# EAGLE board RC_remote (EAGLE 9.6.2)
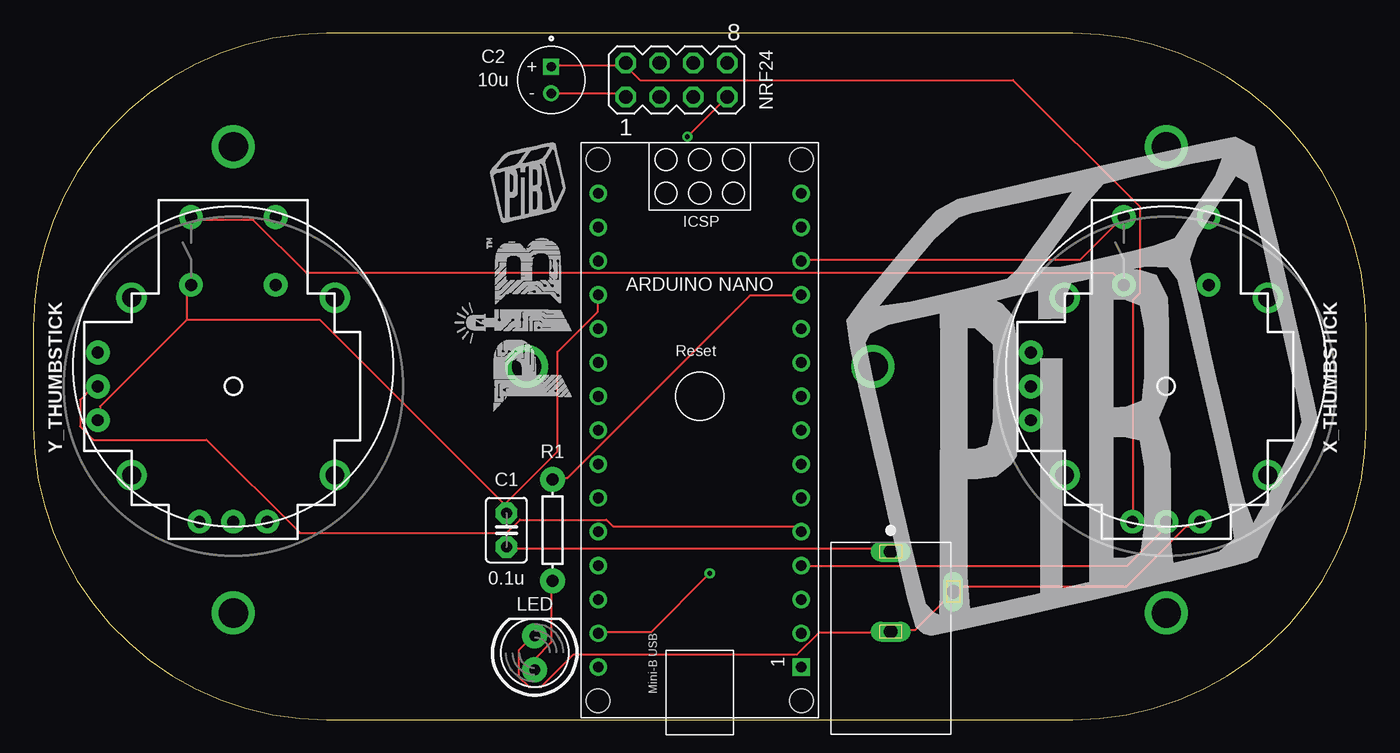
[diagram p0: board, top side]
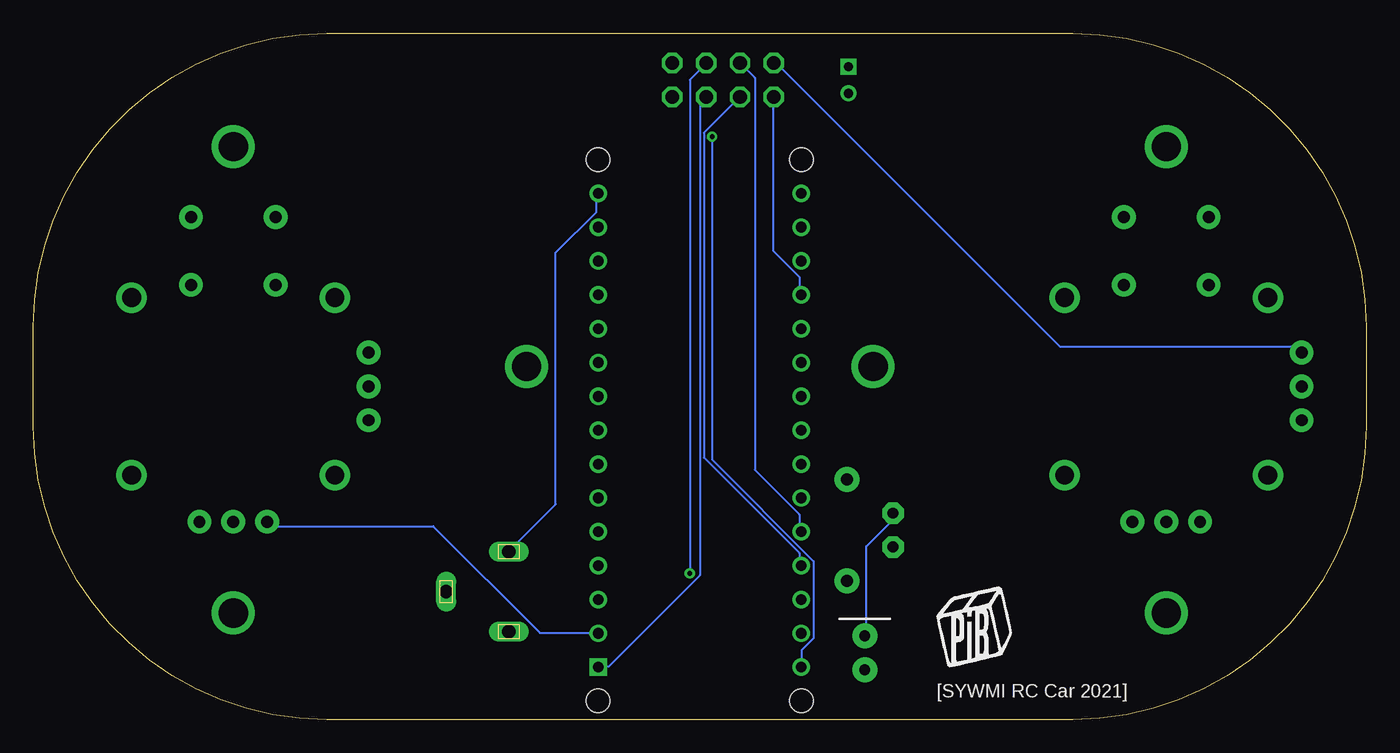
[diagram p1: board, bottom side, seen from below]

Size 100 x 51.5 mm. Coordinates in mm from the lower left corner, seen from the top.
Outline: 0,29.5 0,22 arc90 22,0 78,0 arc90 100,22 100,29.5 arc90 78,51.5 22,51.5 arc90 0,29.5
Copper layers (1*16): Top 0.035mm / dielectric 1.5mm / Bottom 0.035mm
Design rules "default": minimum track width 6mil, minimum drill 0.35mm, track to track 6mil, track to pad 6mil, pad to pad 6mil, via to via 6mil, smd to smd 6mil, copper to edge 40mil, drill to drill 6mil, minimum pad ring 10mil, minimum via ring 8mil, stop-mask expansion 4mil, vias tented up to drill 0mil, thermal gap 10mil

## Footprints (pad centres in the part's own frame; a part is rotated, then mirrored left to right if it is on the bottom)
ARDUINO_NANO = drill 0.8 square: 1 -20.32,-7.62 | drill 0.8: 2 -17.78,-7.62; 3 -15.24,-7.62; 4 -12.7,-7.62; 5 -10.16,-7.62; 6 -7.62,-7.62; 7 -5.08,-7.62; 8 -2.54,-7.62; 9 0,-7.62; 10 2.54,-7.62; 11 5.08,-7.62; 12 7.62,-7.62; 13 10.16,-7.62; 14 12.7,-7.62; 15 15.24,-7.62; 16 15.24,7.62; 17 12.7,7.62; 18 10.16,7.62; 19 7.62,7.62; 20 5.08,7.62; 21 2.54,7.62; 22 0,7.62; 23 -2.54,7.62; 24 -5.08,7.62; 25 -7.62,7.62; 26 -10.16,7.62; 27 -12.7,7.62; 28 -15.24,7.62; 29 -17.78,7.62; 30 -20.32,7.62 | hole 1.778: -22.86,-7.62; -22.86,7.62; 17.78,7.62; 17.78,-7.62
C2.5-3 = drill 0.813 pad 1.6 octagon: 1 -1.27,0; 2 1.27,0
CAPPRD200W50D550H1250 = drill 0.7 square: 1 -1,0 | drill 0.7: 2 1,0
LED_5MM = drill 0.813 pad 1.88: A -1.27,0; K 1.27,0
CUI_PJ-102AH = drill 1 long: 1 -6.5,0; 2 -0.5,0; 3 -3.5,4.7
MA04-2 = drill 1.016 octagon: 1 -3.81,-1.27; 2 -3.81,1.27; 3 -1.27,-1.27; 4 -1.27,1.27; 5 1.27,-1.27; 6 1.27,1.27; 7 3.81,-1.27; 8 3.81,1.27
AXIAL-0.3 = drill 0.9 pad 1.88: P$1 -3.81,0; P$2 3.81,0
JOYSTICK = drill 0.9 pad 1.778: B1A -3.175,12.7; B1B 3.175,12.7; B2A -3.175,7.62; B2B 3.175,7.62 | drill 0.889 pad 1.778: H1 -2.54,-10.16; H2 0,-10.16; H3 2.54,-10.16; V1 -10.16,2.54; V2 -10.16,0; V3 -10.16,-2.54 | drill 1.397 pad 2.286: MOUNT1 -7.62,6.668; MOUNT2 -7.62,-6.668; MOUNT3 7.62,-6.668; MOUNT4 7.62,6.668

## Placement (x,y rotation side)
ARDUINO_NANO1  [ARDUINO_NANO]  50,24.25 90 top
C1  .1u  [C2.5-3]  35.5,14.22 90 top
C2  10u  [CAPPRD200W50D550H1250]  38.85,48 270 top
D1  [LED_5MM]  37.62,5 90 top
J1  PJ-102AH  [CUI_PJ-102AH]  64.33,6.1 270 top
NRF24L01  [MA04-2]  48.25,48 0 top
R1  330  [AXIAL-0.3]  38.95,14.22 270 top
U$1  [PIB_LOGO_40MM]  78.7,25 0 top
U$2  [PIB-LOGO]  36,29.65 90 top
U$3  [PIB_LOGO_10MM]  37.1,40.3 0 top
U$4  [PIB_LOGO_10MM]  29.4,6.95 0 bottom
X_THUMBSTICK  JOYSTICK_THUMB  [JOYSTICK]  85,25 0 top
Y_THUMBSTICK  JOYSTICK_THUMB  [JOYSTICK]  15,25 0 top

## Library data of the parts
ARDUINO_NANO1 = ArduinoNano
C1 = capacitor-wima
C2 = UVR1E100MDD; DESCRIPTION: 10 µF 25 V Aluminum Electrolytic Capacitors Radial, Can - 2000 Hrs @ 85°C; DIGI-KEY_PART_NUMBER: UVR1E100MDD1TA-ND; MF: Nichicon; MP: UVR1E100MDD; PACKAGE: Radial Nichicon; PURCHASE-URL: https://pricing.snapeda.com/search/part/UVR1E100MDD/?ref=eda
D1 = SparkFun-LED
J1 = PJ-102AH; AVAILABILITY: In Stock; CUI_PURCHASE_URL: https://www.cuidevices.com/product/interconnect/connectors/dc-power-connectors/jacks/pj-102ah?utm_source=snapeda.com&utm_medium=referral&utm_campaign=snapedaBOM; DESCRIPTION: 2.0 x 6.5 mm, 5.0 A, Horizontal, Through Hole, Tapered Pins, Dc Power Jack Connector; MF: CUI Devices; MP: PJ-102AH; PACKAGE: None; PRICE: None; PURCHASE-URL: https://pricing.snapeda.com/search/part/PJ-102AH/?ref=eda
NRF24L01 = con-lstb; OC_FARNELL: unknown; OC_NEWARK: unknown
R1 = SparkFun-Resistors
U$1-U$4 = PiB_logo
X_THUMBSTICK Y_THUMBSTICK = SparkFun-Switches; PROD_ID: COMP-09744; SF_SKU: COM-09032

## Nets
0: ARDUINO_NANO1.19 C1.2 C2.2 D1.K J1.2 J1.3 NRF24L01.1 X_THUMBSTICK.H3 Y_THUMBSTICK.B2A Y_THUMBSTICK.V3
3.3V: ARDUINO_NANO1.2 C2.1 NRF24L01.2 X_THUMBSTICK.H1 Y_THUMBSTICK.V1
5V: ARDUINO_NANO1.12 R1.P$1
CE: ARDUINO_NANO1.27 NRF24L01.3
CSN: ARDUINO_NANO1.26 NRF24L01.4
GND: ARDUINO_NANO1.14
MISO: ARDUINO_NANO1.30 NRF24L01.7
MOSI: ARDUINO_NANO1.29 NRF24L01.6
N$1: D1.A R1.P$2
RESET: ARDUINO_NANO1.13 X_THUMBSTICK.B1A
SCK: ARDUINO_NANO1.1 NRF24L01.5
SWITCH: X_THUMBSTICK.B2A Y_THUMBSTICK.B1A
V_IN: ARDUINO_NANO1.15 C1.1 J1.1
X_AXIS: ARDUINO_NANO1.4 X_THUMBSTICK.H2
Y_AXIS: ARDUINO_NANO1.5 Y_THUMBSTICK.V2

## Tracks (layer width: path | path; a pad name or v marks a point on that pad's centre or on a via)
0
  Top 0.152: ARDUINO_NANO1.19 42.37,31.85 42.37,30.63 39.32,27.58 39.32,20.12 35.51,16.31 35.51,15.54 C1.2 35.5,16 21.5,30 11.5,30 | D1.K 37.49,6.25 36.42,5.18 36.42,3.2 37.19,2.44 38.1,2.44 40.54,4.88 57.3,4.88 58.98,6.55 64.31,6.55 J1.2 64.47,6.71 66.14,6.71 68.89,9.45 J1.3 69.5,10 82,10 86.5,14.5 87.5,14.5 X_THUMBSTICK.H3 | C2.2 44.17,47 NRF24L01.1 | 11.5,30 5,23.5 5,22.5 Y_THUMBSTICK.V3 | 11.5,30 11.5,32.5 Y_THUMBSTICK.B2A
  Bottom 0.152: ARDUINO_NANO1.19 42.52,32 42.52,33.22 44.5,35.2 44.5,46.5 NRF24L01.1 | C1.2 35.5,15 37.5,13 37.5,6.5 D1.K
3.3V
  Top 0.152: C2.1 38.86,49.07 44.2,49.07 44.35,49.23 NRF24L01.2 44.5,49 45.5,48 73.5,48 83,38.5 83,32 82.5,31.5 82.5,15 X_THUMBSTICK.H1
  Bottom 0.152: ARDUINO_NANO1.2 58,6.5 62,6.5 70,14.5 82,14.5 X_THUMBSTICK.H1 | Y_THUMBSTICK.V1 5,28 23,28 44,49 NRF24L01.2
5V
  Top 0.152: ARDUINO_NANO1.12 57.61,31.85 53.8,31.85 40.08,18.14 39.01,18.14 R1.P$1
CE
  Bottom 0.152: ARDUINO_NANO1.27 42.52,11.58 42.52,12.5 49.68,19.66 49.68,44.04 47.09,46.63 NRF24L01.3
CSN
  Bottom 0.152: ARDUINO_NANO1.26 42.52,14.17 42.52,15.39 45.87,18.75 45.87,48.16 46.94,49.23 NRF24L01.4
MISO  (via drill 0.35)
  Top 0.152: v49.07,43.74 51.97,46.63 NRF24L01.7
  Bottom 0.152: v49.07,43.74 49.07,19.51 41.45,11.89 41.45,6.1 42.37,5.18 42.37,3.96 ARDUINO_NANO1.30
MOSI  (via drill 0.35)
  Top 0.152: v50.75,10.97 46.33,6.55 42.52,6.55 ARDUINO_NANO1.29
  Bottom 0.152: v50.75,10.97 50.75,48.01 49.53,49.23 NRF24L01.6
N$1
  Top 0.152: D1.A 37.64,3.81 37.64,4.57 38.86,5.79 38.86,10.36 R1.P$2
N$2  (via drill 2.2)
  other vias: 85,43
N$3  (via drill 2.2)
  other vias: 85,8
N$4  (via drill 2.2)
  other vias: 15,8
N$5  (via drill 2.2)
  other vias: 15,43
N$6  (via drill 2.2)
  other vias: 37,26.5
N$7  (via drill 2.2)
  other vias: 63,26.5
RESET
  Top 0.152: ARDUINO_NANO1.13 58,34.5 78.5,34.5 81.5,37.5 X_THUMBSTICK.B1A
SCK
  Bottom 0.152: ARDUINO_NANO1.1 57.61,3.96 56.84,3.96 49.99,10.82 49.99,46.18 49.53,46.63 NRF24L01.5
SWITCH
  Top 0.152: Y_THUMBSTICK.B1A 12,37.5 16.5,37.5 20.5,33.5 81,33.5 81.5,33 X_THUMBSTICK.B2A
V_IN
  Top 0.152: C1.1 35.51,12.8 64.16,12.8 64.31,12.65 J1.1
  Bottom 0.152: ARDUINO_NANO1.15 57.76,39.47 57.76,38.1 60.81,35.05 60.81,16.15 64.31,12.65 J1.1
X_AXIS
  Top 0.152: ARDUINO_NANO1.4 58,11.5 82,11.5 85,14.5 X_THUMBSTICK.H2
Y_AXIS
  Top 0.152: ARDUINO_NANO1.5 57.5,14.5 43.5,14.5 43,15 36.5,15 35.5,14 20,14 13,21 4.5,21 3.5,22 3.5,24 4.5,25 Y_THUMBSTICK.V2

## Text on the board
tPlace: C2 | + | 10u | NRF24 | - | ARDUINO NANO | R1 | C1 | 0.1u | LED
bPlace: [SYWMI RC Car 2021]